# Altium PCB NEMA24.PcbDoc
Units mm, origin at the board's own origin, x right, y up, seen from the top; angles counter-clockwise.
Board outline 62.32 x 39.99 mm, 2 copper layers (Top Layer, Bottom Layer); 19 components, 9 nets, 59 pads, 20 vias.
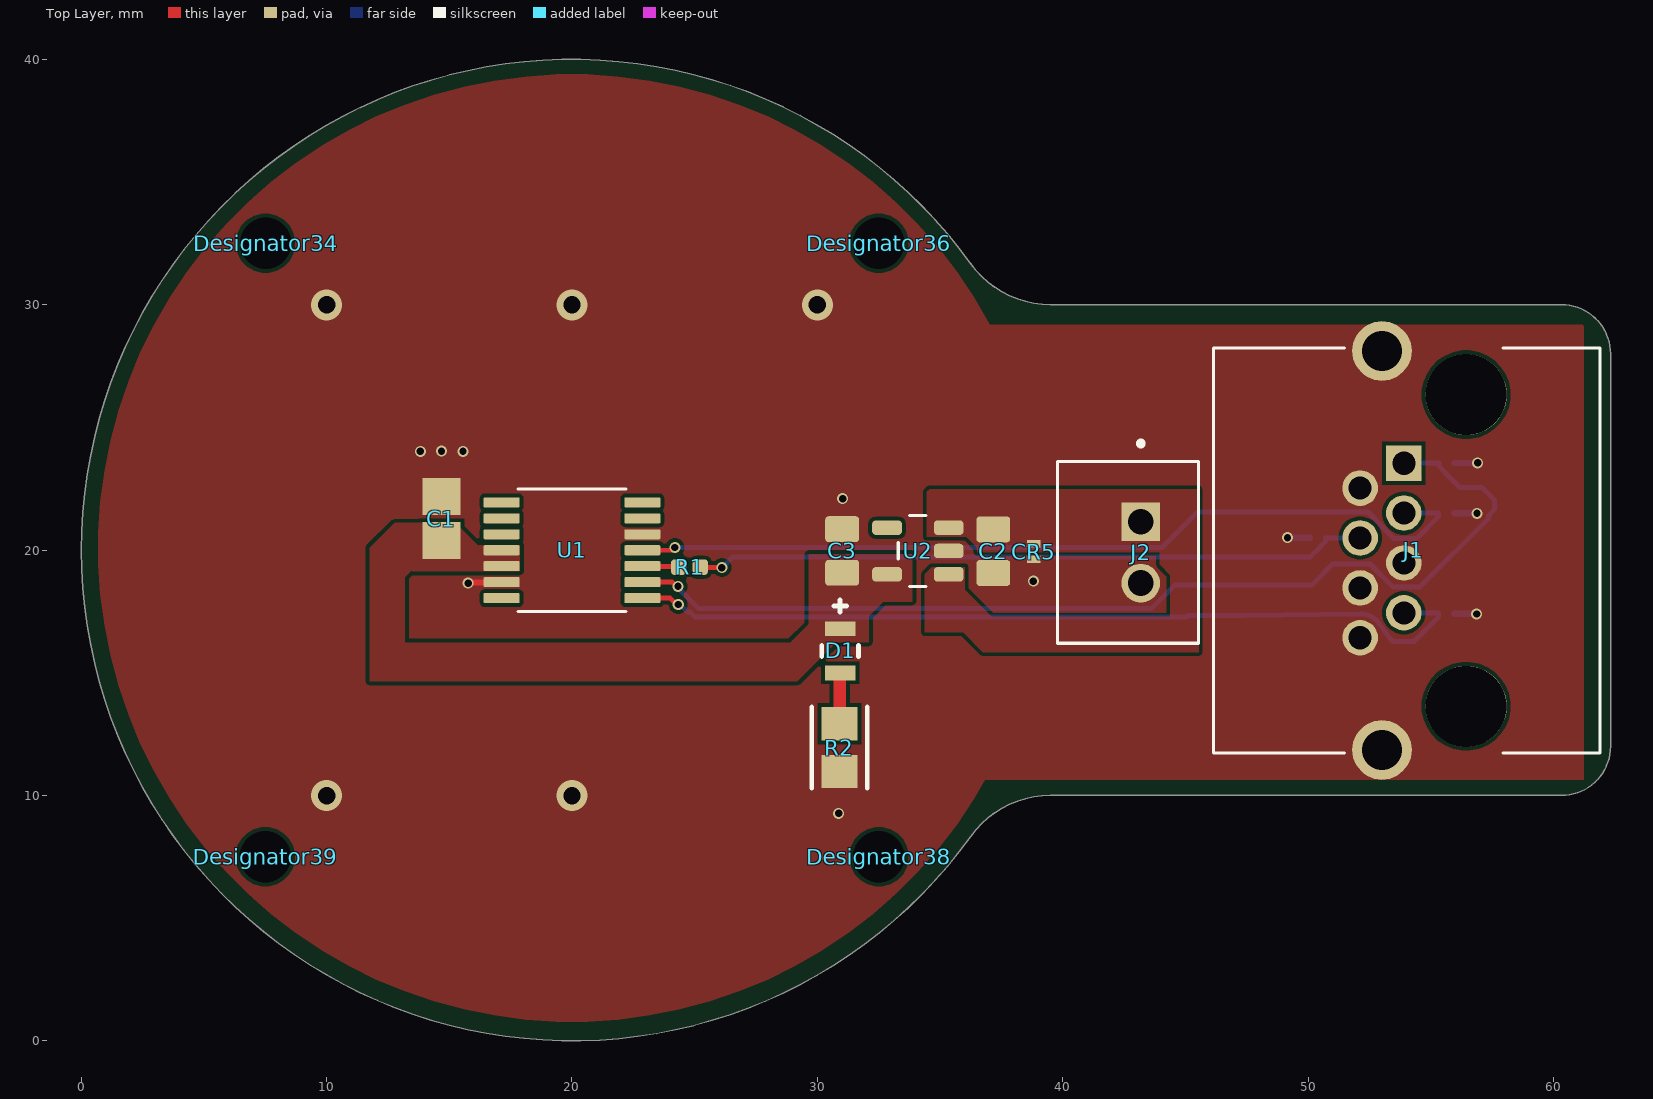
[diagram p0: Top Layer view]
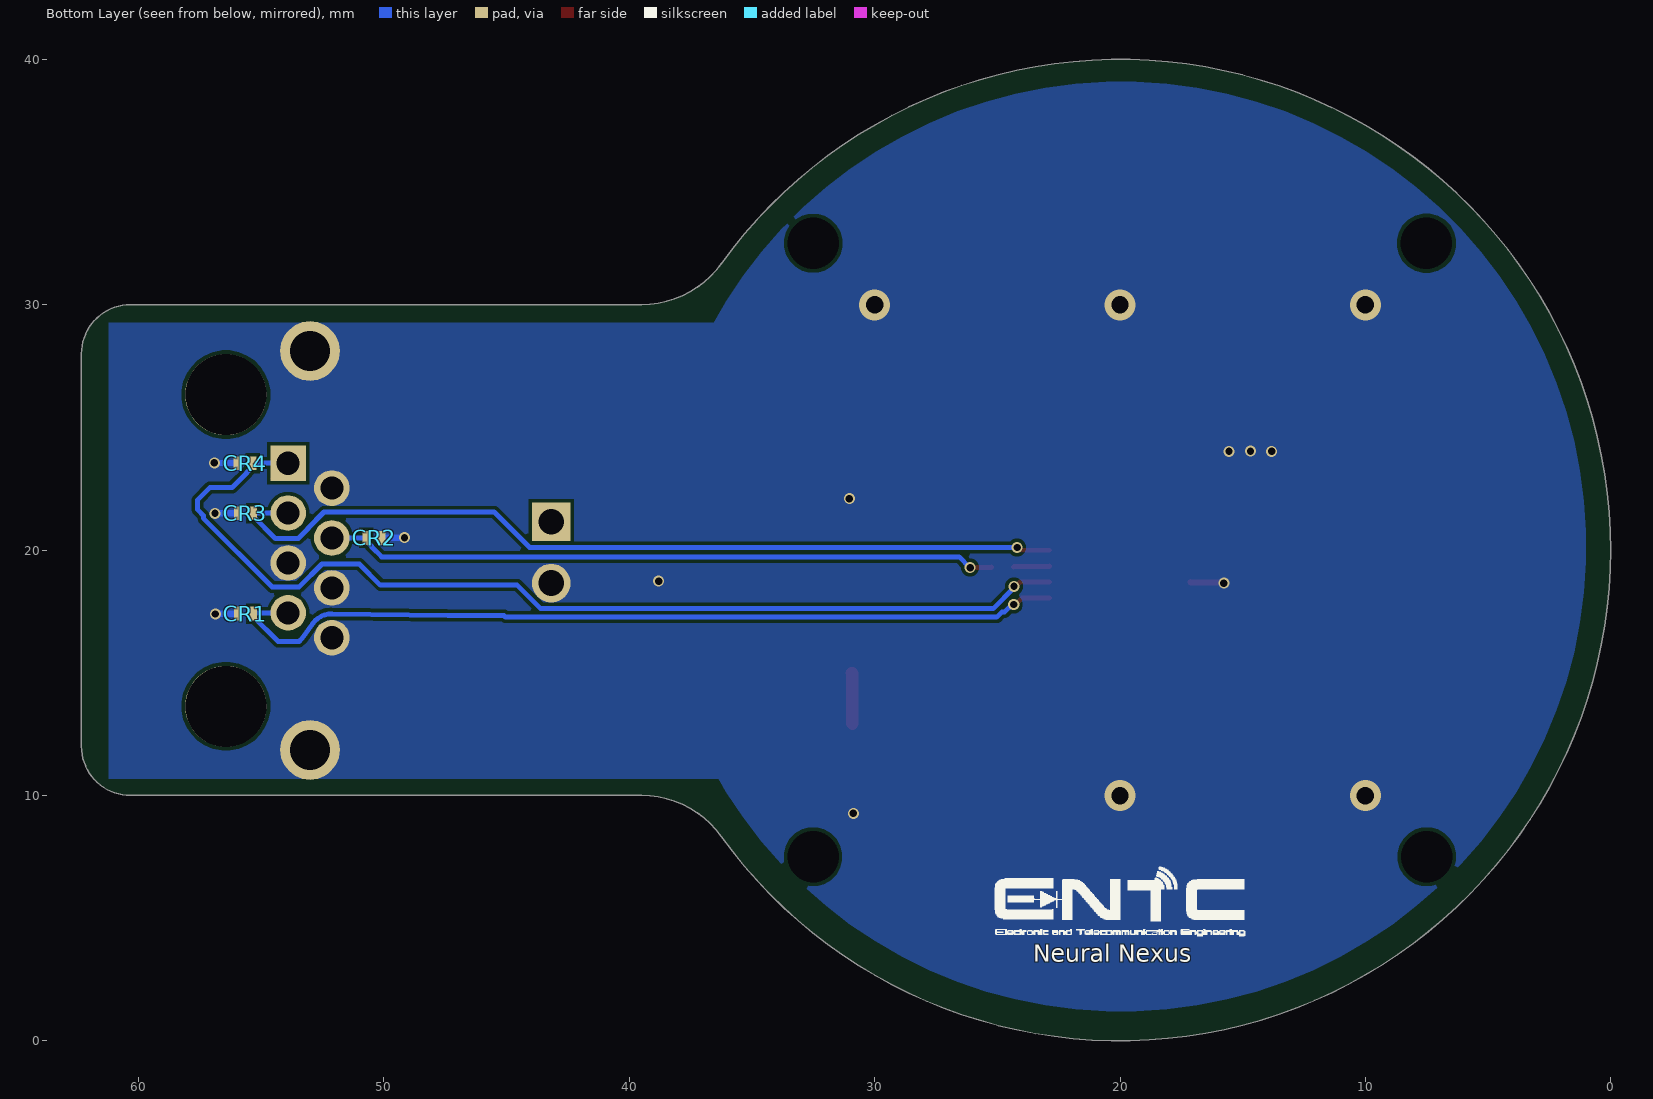
[diagram p1: Bottom Layer view, seen from below]
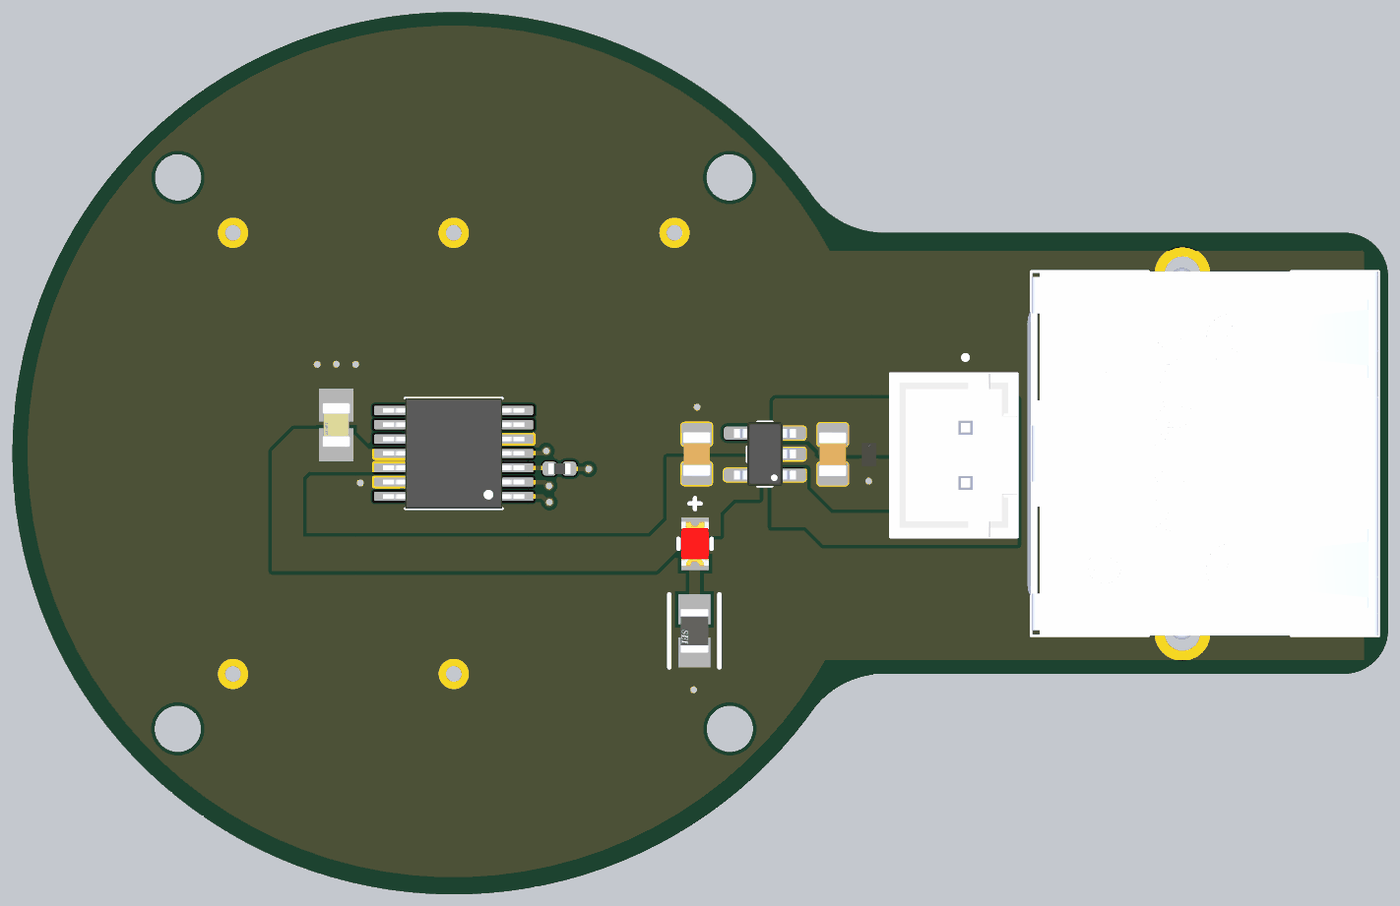
[diagram p2: 3D render of the assembled board from above, using the file's embedded part models]
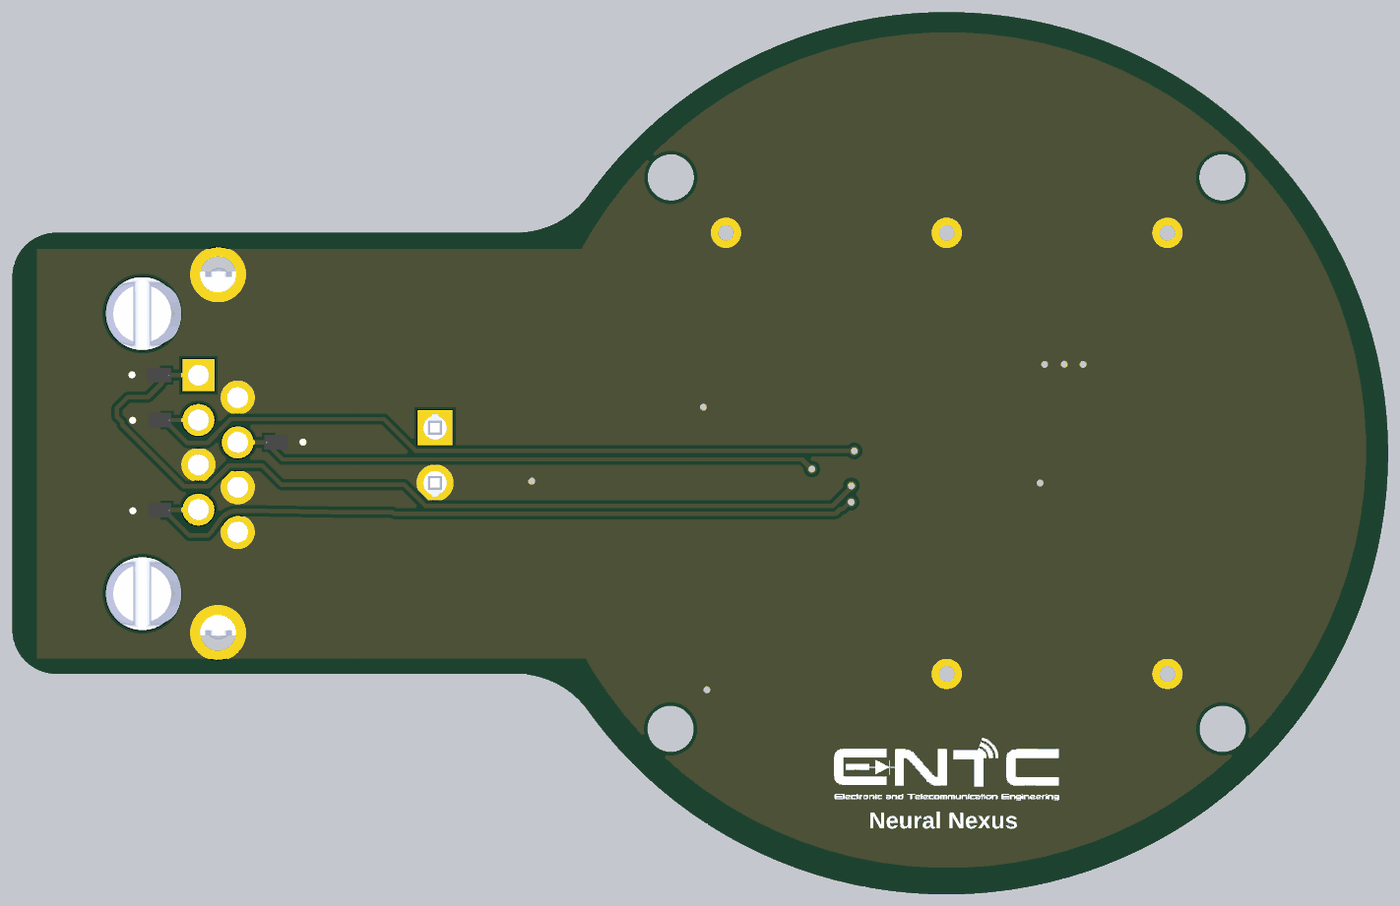
[diagram p3: 3D render of the assembled board from below, using the file's embedded part models]

## Layer stack, top to bottom
Top Solder: solder mask 0.0102, Solder Resist, Dk 3.5
Top Layer: signal copper 0.0356
Dielectric 1: dielectric 0.32, FR-4, Dk 4.8
Bottom Layer: signal copper 0.0356
Bottom Solder: solder mask 0.0102, Solder Resist, Dk 3.5

## Board outline
36.251,8.34 cw(c20.006,20.006) 36.251,31.673 ccw(c39.5,34.006) 39.5,30.006 60.327,30.006 cw(c60.327,28.006) 62.327,28.006 62.327,12.006 cw(c60.327,12.006) 60.327,10.006 39.5,10.006 ccw(c39.5,6.006)

## Design rules (kind name [scope] priority, off if disabled: settings)
Clearance [All] p1: gap=0.15 ignorepadtopadclearanceinfootprint=FALSE
HoleSize [All] p1: absolutevalues=TRUE maxlimit=4 minlimit=0.025 maxpercent=80.000 minpercent=20.000
MinimumSolderMaskSliver [All] p1: minsoldermaskwidth=0.1
PolygonConnect PolygonConnect_1 [InNet('5V') vs InNet('5V')] p1: connectstyle=Direct reliefconductorwidth=0.254 reliefentries=4 polygonreliefangle="90 Angle" airgapwidth=0.254
PolygonConnect PolygonConnect_2 [InNet('3V3') vs InNet('3V3')] p2: connectstyle=Direct reliefconductorwidth=0.254 reliefentries=4 polygonreliefangle="90 Angle" airgapwidth=0.254
PolygonConnect PolygonConnect_3 [InNet('GND') vs InNet('GND')] p3: connectstyle=Direct reliefconductorwidth=0.254 reliefentries=4 polygonreliefangle="90 Angle" airgapwidth=0.254
PolygonConnect [All] p4: connectstyle=Relief reliefconductorwidth=0.254 reliefentries=4 polygonreliefangle="90 Angle" airgapwidth=0.254
RoutingVias [All] p1: holewidth=0.711 width=1.27 viastyle="Through Hole" minholewidth=0.3 minwidth=0.45 maxholewidth=0.711 maxwidth=1.27
SolderMaskExpansion [All] p1: expansion=0.05 istentingtop=FALSE
SupplyNets "Schematic Supply Nets_2" [InNet('GND')] p1: voltage=0.000
SupplyNets "Schematic Supply Nets_1" [InNet('3V3')] p2: voltage=0.000
SupplyNets "Schematic Supply Nets" [InNet('5V')] p3: voltage=0.000
Width [All] p1: maxlimit=1 minlimit=0.15 preferedwidth=0.254
28 further rules are at their usual default settings.

## Classes and differential pairs
component class Encoder: C1 C2 C3 CR1 CR2 CR3 CR4 CR5 D1 J1 J2 R1 R2 U1 U2

## Components (designator, comment, footprint, x,y, rotation, side; value= is the part's Value field where it differs from the comment)
C1 "100nF" FP-C0805C-DN-IPC_A 14.68,21.289 r90 top
C2 "1 uF" CAPC2012X135N 37.17,19.96 r270 top
C3 "2.2 uF" CAPC2012X135N 31.01,19.972 r270 top
CR1 "TVS" SP0402_LTF 55.64,17.42 r0 bottom
CR2 "TVS" SP0402_LTF 50.397,20.5 r180 bottom
CR3 "TVS" SP0402_LTF 55.64,21.51 r0 bottom
CR4 "TVS" SP0402_LTF 55.658,23.55 r0 bottom
CR5 "TVS" SP0402_LTF 38.82,19.943 r270 top
D1 "Green LED" FP-SML-LX0805SRC-TR-MFG 30.93,15.9 r270 top
Designator34 "Comment" MTHNP3P2MM 7.51,32.51 r0 top
Designator36 "Comment" MTHNP3P2MM 32.5,32.51 r0 top
Designator38 "Comment" MTHNP3P2MM 32.51,7.51 r0 top
Designator39 "Comment" MTHNP3P2MM 7.5,7.51 r0 top
J1 "RJ45" AMPHENOL_RJHSE5380 56.44,19.99 r90 top locked
J2 "B2B-XH-A" JST_B2B-XH-A 42.655,19.91 r90 top
R1 "22R 0402" R0402 24.79,19.31 r180 top
R2 "330R" FP-RMCF0805-IPC_A 30.9,11.954 r270 top
U1 "AS5047P" SOP65P640X120-14N 20,20 r180 top locked
U2 "TLV75733PDBVR" SOT95P280X145-5N 34.095,19.97 r180 top

## Footprints (in the part's own frame and the unit in brackets; to place one, negate y for a bottom-side part, rotate by r counter-clockwise, add the part's x,y. Pads: shape width x height; smd on the part's side, far side on the other; paste and mask are expansions set on the pad)
AMPHENOL_RJHSE5380 [mm]
  rect 1.448x1.448 / inner round 1.448 / far side rect 1.448x1.448 hole 0.94: 1(3.556,2.54)
  round 1.448 hole 0.94: 2(2.54,4.32) 3(1.524,2.54) 4(0.508,4.32) 5(-0.508,2.54) 6(-1.524,4.32) 7(-2.54,2.54) 8(-3.556,4.32)
  round 2.43 hole 1.62: SH1(-8.13,3.43) SH2(8.13,3.43)
  round 3.3 hole 3.3 unplated: ""(-6.35,0) ""(6.35,0)
  silkscreen extent -8.25,-5.46 8.26,10.29, body extent -8.42,-5.46 8.42,10.46, height 15.06
CAPC2012X135N [mm]
  rrect25% 1.05x1.38 smd: 1(-0.888,0) 2(0.888,0)
  body extent -1,-0.63 1,0.63, height 1.35
FP-C0805C-DN-IPC_A [mm]
  rect 1.505x1.556 smd paste+0 mask+0: 1(-0.901,0) 2(0.901,0)
  body extent -2.15,-1.28 2.15,1.28, height 0.25
FP-RMCF0805-IPC_A [mm]
  rect 1.355x1.462 smd paste+0 mask+0: 1(-0.976,0) 2(0.976,0)
  silkscreen extent -1.65,-1.13 1.65,1.13, body extent -2.15,-1.23 2.15,1.23, height 0.25
FP-SML-LX0805SRC-TR-MFG [mm]
  rect 0.6x1.25 smd paste+0 mask+0: 1(-0.9,0) 2(0.9,0)
  silkscreen extent -2.07,-0.75 0.22,0.75, body extent -1.3,-0.85 1.3,0.85, height 0.25
JST_B2B-XH-A [mm]
  rect 1.575x1.575 / inner round 1.575 / far side rect 1.575x1.575 hole 1.05: 1(1.25,-0.525)
  round 1.575 hole 1.05: 2(-1.25,-0.525)
  silkscreen extent -3.7,-2.88 4.54,2.88, body extent -3.7,-2.88 3.7,2.88, height 7
MTHNP3P2MM [mm] "Mounting Hole Non plated 3.2mm"
  round 1 hole 2.1 unplated: ""(0,0)
R0402 [mil]
  rrect50% 25x25 smd mask+2.95: 1(-17.5,0) 2(17.5,0)
  body extent -20,-10 20,10, height 16
SOP65P640X120-14N [mm]
  rrect25% 1.47x0.41 smd paste+0 mask+0.102: 1(-2.87,1.95) 2(-2.87,1.3) 3(-2.87,0.65) 4(-2.87,0) 5(-2.87,-0.65) 6(-2.87,-1.3) 7(-2.87,-1.95) 8(2.87,-1.95) 9(2.87,-1.3) 10(2.87,-0.65) 11(2.87,0) 12(2.87,0.65) 13(2.87,1.3) 14(2.87,1.95)
  silkscreen extent -2.2,-2.5 2.2,2.5, body extent -3.2,-2.5 3.2,2.5, height 1.2
SOT95P280X145-5N [mm]
  rrect50% 1.21x0.59 smd: 1(-1.255,0.95) 2(-1.255,0) 3(-1.255,-0.95) 4(1.255,-0.95) 5(1.255,0.95)
  silkscreen extent -0.33,-1.45 0.8,1.45, body extent -1.4,-1.45 1.4,1.45, height 1.45
SP0402_LTF [mil]
  rect 12x22 smd paste+0 mask-1: 1(-12.5,0) 2(12.5,0)
  body extent -21,-13 21,13, height 22

## Part data
C1: library part C0805C104K4RACTU, "Multilayer Ceramic Capacitors MLCC - SMD/SMT 16V 0.1uF X7R 0805 10%", Case Code (Imperial)=0805, Dielectric=X7R, Dielectric Material=Ceramic, Manufacturer="Yageo Group", Manufacturer Package Identifier="0805 (2012 metric)", Max Operating Temperature=125°C, Min Operating Temperature=-55°C, Supplier Part Number=399-C0805C104K4RACTUCT-ND, Temperature Coefficient=30ppm/°C, Tolerance=10%, Voltage=16V, Case/Package=0805, Category="Ceramic Capacitors", China RoHS=Compliant, ComponentLink1Description=https://datasheet.octopart.com:443/C0805C104K4RACTU-KEMET-datasheet-178445679.pdf?src-supplier=IHS, ComponentLink1URL=https://datasheet.octopart.com:443/C0805C104K4RACTU-KEMET-datasheet-178445679.pdf?src-supplier=IHS, ComponentLink2Description=https://datasheet.octopart.com:443/C0805C104K4RACTU-KEMET-datasheet-182041125.pdf?src-supplier=IHS, ComponentLink2URL=https://datasheet.octopart.com:443/C0805C104K4RACTU-KEMET-datasheet-182041125.pdf?src-supplier=IHS, ComponentLink3Description=https://datasheet.octopart.com:443/C0805C104K4RACTU-KEMET-datasheet-137357759.pdf?src-supplier=Farnell, ComponentLink3URL=https://datasheet.octopart.com:443/C0805C104K4RACTU-KEMET-datasheet-137357759.pdf?src-supplier=Farnell, ComponentLink4Description=https://datasheet.octopart.com:443/C0805C104K4RACTU-KEMET-datasheet-99356104.pdf?src-supplier=Farnell, ComponentLink4URL=https://datasheet.octopart.com:443/C0805C104K4RACTU-KEMET-datasheet-99356104.pdf?src-supplier=Farnell, ComponentLink5Description=https://datasheet.octopart.com:443/C0805C104K4RACTU-Kemet-datasheet-32036385.pdf?src-supplier=Farnell, ComponentLink5URL=https://datasheet.octopart.com:443/C0805C104K4RACTU-Kemet-datasheet-32036385.pdf?src-supplier=Farnell, ComponentLink6Description=https://datasheet.octopart.com:443/C0805C104K4RACTU-Kemet-datasheet-27203261.pdf?src-supplier=Farnell, ComponentLink6URL=https://datasheet.octopart.com:443/C0805C104K4RACTU-Kemet-datasheet-27203261.pdf?src-supplier=Farnell, ComponentLink7Description=https://datasheet.octopart.com:443/C0805C104K4RACTU-KEMET-datasheet-68331921.pdf?src-supplier=Upverter, ComponentLink7URL=https://datasheet.octopart.com:443/C0805C104K4RACTU-KEMET-datasheet-68331921.pdf?src-supplier=Upverter, ComponentLink8Description=https://datasheet.octopart.com:443/C0805C104K4RACTU-Kemet-datasheet-66076749.pdf?src-supplier=element14+APAC, ComponentLink8URL=https://datasheet.octopart.com:443/C0805C104K4RACTU-Kemet-datasheet-66076749.pdf?src-supplier=element14+APAC, ComponentLink9Description=https://datasheet.octopart.com:443/C0805C104K4RACTU-Kemet-datasheet-66552730.pdf?src-supplier=element14+APAC, ComponentLink9URL=https://datasheet.octopart.com:443/C0805C104K4RACTU-Kemet-datasheet-66552730.pdf?src-supplier=element14+APAC, ComponentLink10Description=https://datasheet.octopart.com:443/C0805C104K4RACTU-KEMET-datasheet-37550250.pdf?src-supplier=Electro+Sonic, ComponentLink10URL=https://datasheet.octopart.com:443/C0805C104K4RACTU-KEMET-datasheet-37550250.pdf?src-supplier=Electro+Sonic, ComponentLink11Description=https://datasheet.octopart.com:443/C0805C104K4RACTU-KEMET-datasheet-164512540.pdf?src-supplier=TME, ComponentLink11URL=https://datasheet.octopart.com:443/C0805C104K4RACTU-KEMET-datasheet-164512540.pdf?src-supplier=TME, ComponentLink12Description=https://datasheet.octopart.com:443/C0805C104K4RACTU-KEMET-datasheet-103094571.pdf?src-supplier=TME, ComponentLink12URL=https://datasheet.octopart.com:443/C0805C104K4RACTU-KEMET-datasheet-103094571.pdf?src-supplier=TME, ComponentLink13Description=https://datasheet.octopart.com:443/C0805C104K4RACTU-KEMET-datasheet-68331906.pdf?src-supplier=TME, ComponentLink13URL=https://datasheet.octopart.com:443/C0805C104K4RACTU-KEMET-datasheet-68331906.pdf?src-supplier=TME, ComponentLink14Description=https://datasheet.octopart.com:443/C0805C104K4RACTU-KEMET-datasheet-110724412.pdf?src-supplier=RS+(Formerly+Allied+Electronics), ComponentLink14URL=https://datasheet.octopart.com:443/C0805C104K4RACTU-KEMET-datasheet-110724412.pdf?src-supplier=RS+(Formerly+Allied+Electronics), ComponentLink15Description=https://datasheet.octopart.com:443/C0805C104K4RACTU-Kemet-datasheet-464.pdf?src-supplier=RS+(Formerly+Allied+Electronics), ComponentLink15URL=https://datasheet.octopart.com:443/C0805C104K4RACTU-Kemet-datasheet-464.pdf?src-supplier=RS+(Formerly+Allied+Electronics), ComponentLink16Description=https://datasheet.octopart.com/C0805C104K4RACTU-KEMET-datasheet-84169754.pdf, ComponentLink16URL=https://datasheet.octopart.com/C0805C104K4RACTU-KEMET-datasheet-84169754.pdf, ComponentLink17Description=https://datasheet.octopart.com:443/C0805C104K4RACTU-Kemet-datasheet-21527579.pdf?src-supplier=Newark, ComponentLink17URL=https://datasheet.octopart.com:443/C0805C104K4RACTU-Kemet-datasheet-21527579.pdf?src-supplier=Newark, ComponentLink18Description=https://datasheet.octopart.com:443/C0805C104K4RACTU-Kemet-datasheet-17019117.pdf?src-supplier=Newark, ComponentLink18URL=https://datasheet.octopart.com:443/C0805C104K4RACTU-Kemet-datasheet-17019117.pdf?src-supplier=Newark, ComponentLink19Description=https://datasheet.octopart.com:443/C0805C104K4RACTU-Kemet-datasheet-11795462.pdf?src-supplier=Arrow+Electronics, ComponentLink19URL=https://datasheet.octopart.com:443/C0805C104K4RACTU-Kemet-datasheet-11795462.pdf?src-supplier=Arrow+Electronics, ComponentLink20Description=https://datasheet.octopart.com:443/C0805C104K4RACTU-Kemet-datasheet-5313890.pdf?src-supplier=Verical, ComponentLink20URL=https://datasheet.octopart.com:443/C0805C104K4RACTU-Kemet-datasheet-5313890.pdf?src-supplier=Verical, ComponentLink21Description=https://datasheet.octopart.com:443/C0805C104K4RAC-TU-Kemet-datasheet-8203742.pdf?src-supplier=Jameco, ComponentLink21URL=https://datasheet.octopart.com:443/C0805C104K4RAC-TU-Kemet-datasheet-8203742.pdf?src-supplier=Jameco, ComponentLink22Description=http://sigma.octopart.com:80/conflict_mineral_statement/Yageo-company-3.pdf?src-supplier=Compliance+Statements, ComponentLink22URL=http://sigma.octopart.com:80/conflict_mineral_statement/Yageo-company-3.pdf?src-supplier=Compliance+Statements, ComponentLink23Description=http://sigma.octopart.com:80/rohs_statement/Yageo-company-2.pdf?src-supplier=Compliance+Statements, ComponentLink23URL=http://sigma.octopart.com:80/rohs_statement/Yageo-company-2.pdf?src-supplier=Compliance+Statements, Contact Plating=Tin, Country of Origin=Mexico, Depth=1.25mm, Export Control Classification Number (ECCN) Code=EAR99, Harmonized Tariff Schedule (HTS) Code=8532.24.00.20, Height=780µm, Introduction Date=2008-01-10, Lead Free="Lead Free", Lead Pitch=750µm, Length=2mm, Lifecycle Status=Production, Manufacturer Part Number=C0805C104K4RACTU, Material=Ceramic, Mounting Technology="Surface Mount", Number of Terminals=2, Packaging="Cut Tape", Pins=2, Pricing="1=0.16, 10=0.092, 50=0.0648, 100=0.0564, 500=0.04244, 1000=0.03815 (USD)", Radiation Hardening=No, REACH SVHC=Yes, RoHS=Compliant, Schedule B="8532240020, 8532240020|8532240020, 8532240020|8532240020|8532240020, 8532240020|8532240020|8532240020|8532240020", Stock=138662, Supplier=DigiKey, Termination=SMD/SMT, Thickness=889µm, Voltage Rating=16V, Voltage Rating (DC)=16V, Width=1.25mm
C2: library part CL21B105KAFNNNE, "1 ÂµF Â±10% 25V Ceramic Capacitor X7R 0805 (2012 Metric)", Package="SMD-2 Samsung", Check_prices=https://www.snapeda.com/parts/CL21B105KAFNNNE/Samsung/view-part/?ref=eda, MF="Samsung Electro-Mechanics", MP=CL21B105KAFNNNE, SnapEDA_Link=https://www.snapeda.com/parts/CL21B105KAFNNNE/Samsung/view-part/?ref=snap
C3: library part CL21B225KAFNNNE, "2.2 ÂµF Â±10% 25V Ceramic Capacitor X7R 0805 (2012 Metric)", Package="SMD-2 Samsung", Check_prices=https://www.snapeda.com/parts/CL21B225KAFNNNE/Samsung/view-part/?ref=eda, MF=Samsung, MP=CL21B225KAFNNNE, SnapEDA_Link=https://www.snapeda.com/parts/CL21B225KAFNNNE/Samsung/view-part/?ref=snap
CR1 CR2 CR3 CR4 CR5: library part SP0402B-ULC-01ETG, "TVS DIODE 7VWM 10VC DFN1006-2L", Manufacturer_Name="Littelfuse Inc", Copyright="Copyright (C) 2025 Ultra Librarian. All rights reserved.", Manufacturer_Part_Number=SP0402B-ULC-01ETG, RefDes=RefDes, Type=Type
D1: library part "RED GREEN", "LED RED CLEAR SMD", TRONIC part No=LE0011
J1: library part RJHSE5380, "CONN MOD JACK 8P8C R/A SHIELDED", Package=None, Availability=Unavailable, MF=Amphenol, MP=RJHSE5380, Price=None
J2: Package=None, Availability=Unavailable, MF="{'manufacturer': u'JST Sales America Inc.'}", MP=B2B-XH-A, Price=None
R1: library part SMD-RES-22R-1%-1/16W(0402), "22 Ohms Â±1% 0.063W, 1/16W Chip Resistor 0402 (1005 Metric) Moisture Resistant Thick Film", Package="0402 Yageo", Check_prices=https://www.snapeda.com/parts/RC0402FR-0722RL/Yageo/view-part/?ref=eda, MF=Yageo, MP=RC0402FR-0722RL, SnapEDA_Link=https://www.snapeda.com/parts/RC0402FR-0722RL/Yageo/view-part/?ref=snap
R2: library part CMP-26527-004125-1, "330Ω ±5% 0.125W 0805 Thick Film Chip Resistor AEC-Q200 compliant", Case Code (Imperial)=0805, Case Code (Metric)=2012, Max Operating Temperature=155°C, Max Power Dissipation=125mW, Min Operating Temperature=-55°C, Resistor Type="Thick Film", Temperature Coefficient=200ppm/°C, Tolerance=5%, Case/Package=0805, Construction=Rectangular, Contact Plating=Tin, Depth=1.25mm, Features="Automotive AEC-Q200", Height=0.026inch, Lead Free="Lead Free", Length=2mm, Military Standard=Not, Mount="Surface Mount", Number of Terminations=2, Packaging="Tape and Reel", Power Rating=125mW, Radiation Hardening=No, Resistance=330R, RoHS Compliant=Yes, Series=RMCF, Size Code=0805, Width=0.049inch
U1: library part AS5047P-ATSM, "Rotary Encoder Magnetic Programmable PWM -", Package="TSSOP-14 ams", Check_prices=https://www.snapeda.com/parts/AS5047P-ATSM/ams/view-part/?ref=eda, MF=ams, MP=AS5047P-ATSM, SnapEDA_Link=https://www.snapeda.com/parts/AS5047P-ATSM/ams/view-part/?ref=snap
U2: "1-A, low-IQ high-accuracy low-dropout (LDO) voltage regulator with enable", Package="SOT-23-5 Texas Instruments", Check_prices=https://www.snapeda.com/parts/TLV75733PDBVR/Texas+Instruments/view-part/?ref=eda, MF="Texas Instruments", MP=TLV75733PDBVR, SnapEDA_Link=https://www.snapeda.com/parts/TLV75733PDBVR/Texas+Instruments/view-part/?ref=snap

## Via types
v1: diameter 0.45, hole 0.3, Top Layer to Bottom Layer, 15 vias
v2: diameter 1.27, hole 0.711, Top Layer to Bottom Layer, 5 vias

## Nets (pads, with @x,y where several pads share a name; then routed paths per layer and width w, separated by ;. In a path a pad name is that pad's centre, name@x,y a point inside that pad or via, vN(x,y) a via of type N, cw(c..) or ccw(c..) an arc to the next point about the centre after c; other vN are vias at no path point)
3V3: C1.1 C3.2 D1.1 U1.11 U1.12 U2.5
5V: C2.1 CR5.1 J2.1 U2.1 U2.3
CS: CR1.1 J1.7 U1.1 | length 35.3
  Top Layer w0.2: U1.1 24.002,18.05 24.262,17.79 v1(24.33,17.79)
  Bottom Layer w0.2: v1(24.33,17.79) 24.398,17.79 24.71,17.477 24.82,17.477 25.024,17.273 45.045,17.273 45.105,17.333 47.393,17.333 52.104,17.408 cw(c52.12,16.434) 52.915,16.997 53.34,16.397 53.457,16.28 53.493,16.28 54.31,16.28 55.323,17.293 CR1.1 55.307,17.435 53.915,17.435 J1.7
GND: C1.2 C2.2 C3.1 CR1.2 CR2.2 CR3.2 CR4.2 CR5.2 J1.2 J1.5 J1.6 J1.8 J1.SH1 J1.SH2 J2.2 R2.2 U1.5 U1.13 U2.2 | length 5.1
  Top Layer w0.254: v1(15.77,18.66) 15.79,18.68 17.11,18.68 U1.13
  Bottom Layer w0.254: v1(49.16,20.51) 49.165,20.505 50.075,20.505 CR2.2 ; CR1.2 55.968,17.41 56.86,17.41 v1(56.87,17.4) ; CR3.2 55.963,21.505 56.875,21.505 v1(56.88,21.5) ; CR4.2 55.98,23.555 56.905,23.555 v1(56.91,23.56)
  other v1: 30.87,9.28 38.8,18.74 31.03,22.1 13.82,24.03 14.68,24.04 15.56,24.03
  other v2: 10,10 20,10 10,30 20,30 30,30
MISO: CR2.1 J1.4 R1.1 | length 27.5
  Top Layer w0.2: R1.1 25.245,19.3 26.1,19.3 v1(26.11,19.29)
  Bottom Layer w0.2: v1(26.11,19.29) 26.119,19.29 26.556,19.727 50.093,19.727 50.482,20.117 50.482,20.14 50.715,20.373 CR2.1 50.716,20.499 52.119,20.499 J1.4
MOSI: CR3.1 J1.3 U1.4 | length 35.5
  Top Layer w0.2: U1.4 24.082,20 v1(24.192,20.11)
  Bottom Layer w0.2: v1(24.192,20.11) 44.059,20.11 45.505,21.556 52.439,21.556 53.094,20.901 53.094,20.873 53.487,20.48 54.419,20.48 55.323,21.383 CR3.1 55.321,21.512 53.902,21.512 J1.3
NetD1_2: D1.2 R2.1 | length 2.1
  Top Layer w0.5: R2.1 30.915,12.945 30.915,14.985 D1.2
NetR1_2: R1.2 U1.3 | length 1.5
  Top Layer w0.2: U1.3 22.89,19.33 24.326,19.33 R1.2
SCK: CR4.1 J1.1 U1.2 | length 43.4
  Top Layer w0.2: U1.2 24.082,18.7 24.252,18.53 v1(24.32,18.53) ; J1.1 J1.1@54.524,22.922
  Bottom Layer w0.2: v1(24.32,18.53) 24.32,18.472 25.169,17.622 43.61,17.622 44.567,18.58 50.14,18.58 51,19.44 52.523,19.44 53.455,18.508 54.56,18.508 57.355,21.303 57.355,21.415 57.59,21.65 57.59,22.05 57.09,22.55 56.19,22.55 55.573,23.167 55.573,23.19 55.34,23.423 CR4.1 53.904,23.55 J1.1
pads on no net: Designator34. Designator36. Designator38. Designator39. J1. U1.6 U1.7 U1.8 U1.9 U1.10 U1.14 U2.4

## Polygon pours and split planes (outlines as drawn)
GND on Top Layer "VEE_-5V0_L03_P-001" (solid, remove dead copper, pour order 10): 20,0.791 cw(c20,20.09) 0.701,20.09 cw(c20,20.09) 20,39.389 cw(c20,20.09) 39.299,20.09 cw(c20,20.09)
5V on Top Layer "VEE_-5V0_L03_P-001" (solid, remove dead copper, pour order 1): 43.95,19.95 43.95,19.42 44.38,18.99 44.38,17.29 37.11,17.29 36.01,18.39 36.01,19.31 34.67,19.31 34.38,19.02 34.38,16.65 35.94,16.65 36.74,15.85 45.55,15.85 45.55,22.47 45.53,22.49 44.63,22.49
5V on Top Layer "VEE_-5V0_L03_P-001" (solid, remove dead copper, pour order 0): 36.51,19.93 36.52,19.92 44.64,19.92 44.64,22.5 44.63,22.49 34.57,22.49 34.46,22.38 34.46,20.55 36.07,20.55 36.5,20.12
GND on Top Layer "VEE_-5V0_L03_P-001" (solid, remove dead copper, pour order 9): 36.58,29.18 61.09,29.18 61.15,29.24 61.23,29.16 61.23,10.64 35.35,10.64 35,10.99 35,28.86
3V3 on Top Layer "VEE_-5V0_L03_P-001" (solid, remove dead copper, pour order 3): 16.17,20.18 16.19,20.2 17.88,20.2 17.88,19.12 17.85,19.15 13.49,19.15 13.46,19.18 13.18,18.9 13.18,16.22 28.89,16.22 29.85,17.18 30.78,16.25 29.19,14.66 11.76,14.66 11.76,20.1 12.77,21.11 15.24,21.11
3V3 on Top Layer "VEE_-5V0_L03_P-001" (solid, remove dead copper, pour order 2): 33.86,19.65 33.86,17.91 32.69,17.91 32.09,17.31 32.09,16.25 29.74,16.25 29.7,16.21 29.65,16.26 29.65,19.83 33.849,19.83
GND on Bottom Layer "VEE_-5V0_L03_P-001" (solid, remove dead copper, pour order 7): 19.949,1.211 cw(c19.949,20.149) 1.011,20.149 cw(c19.949,20.149) 19.949,39.087 cw(c19.949,20.149) 38.887,20.149 cw(c19.949,20.149)
GND on Bottom Layer "VEE_-5V0_L03_P-001" (solid, remove dead copper, pour order 5): 35.43,29.28 61.22,29.28 61.22,10.69 35.09,10.69

## Silkscreen, mask and mechanical layers (free items; w line width, h text height)
Bottom Overlay:
  drawing of 40 lines, arcs and shapes, not listed
  text "Neural Nexus" at 23.53,2.994 h1.2
Mechanical 1:
  circle w0.013: c32.506,7.506 r1
  circle w0.013: c32.506,7.506 r1
  circle w0.013: c7.506,32.506 r1
  circle w0.013: c32.506,32.506 r1
  circle w0.013: c7.506,7.506 r1
  circle w0.013: c7.506,7.506 r1
  circle w0.013: c32.506,32.506 r1
  circle w0.013: c7.506,32.506 r1
  lines w0.013: 36.251,8.34 cw(c39.5,6.006) 39.5,10.006 ; 36.251,8.34 cw(c39.5,6.006) 39.5,10.006 ; 36.251,8.34 cw(c20.006,20.006) 36.251,31.673 ; 36.251,31.673 ccw(c39.5,34.006) 39.5,30.006 ; 36.251,31.673 ccw(c39.5,34.006) 39.5,30.006 ; 39.5,10.006 60.327,10.006 ; 39.5,10.006 60.327,10.006 ; 39.5,30.006 60.327,30.006 ; 39.5,30.006 60.327,30.006 ; 60.327,10.006 ccw(c60.327,12.006) 62.327,12.006 ; 60.327,10.006 ccw(c60.327,12.006) 62.327,12.006 ; 60.327,30.006 cw(c60.327,28.006) 62.327,28.006 ; 60.327,30.006 cw(c60.327,28.006) 62.327,28.006 ; 62.327,12.006 62.327,28.006 ; 62.327,12.006 62.327,28.006